# Altium PCB USB-NSTr_v3.PcbDoc
Units mil, origin at the board's own origin, x right, y up, seen from the top; angles counter-clockwise.
Board outline 1496.06 x 2404.88 mil, 2 copper layers (Top Layer, Bottom Layer), stack 65.792 mil thick; 48 components, 60 nets, 213 pads, 50 vias.
Unrouted connection lines stored in the file: 1.
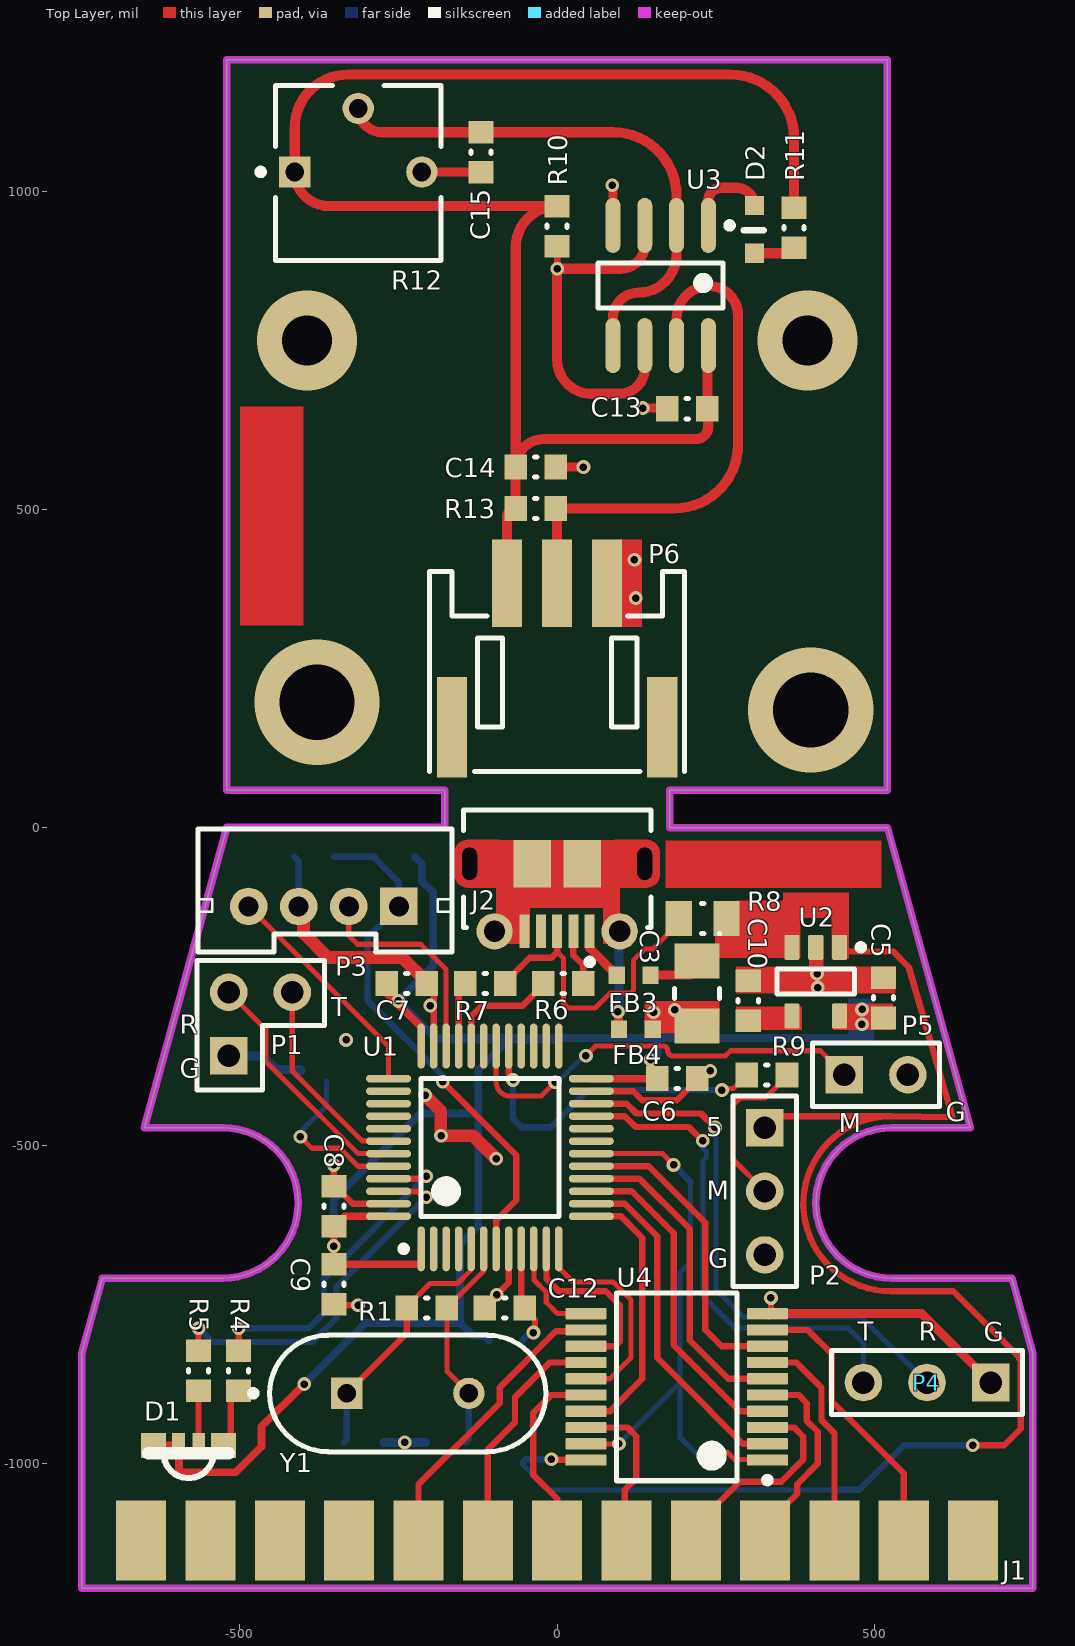
[diagram p0: Top Layer view]
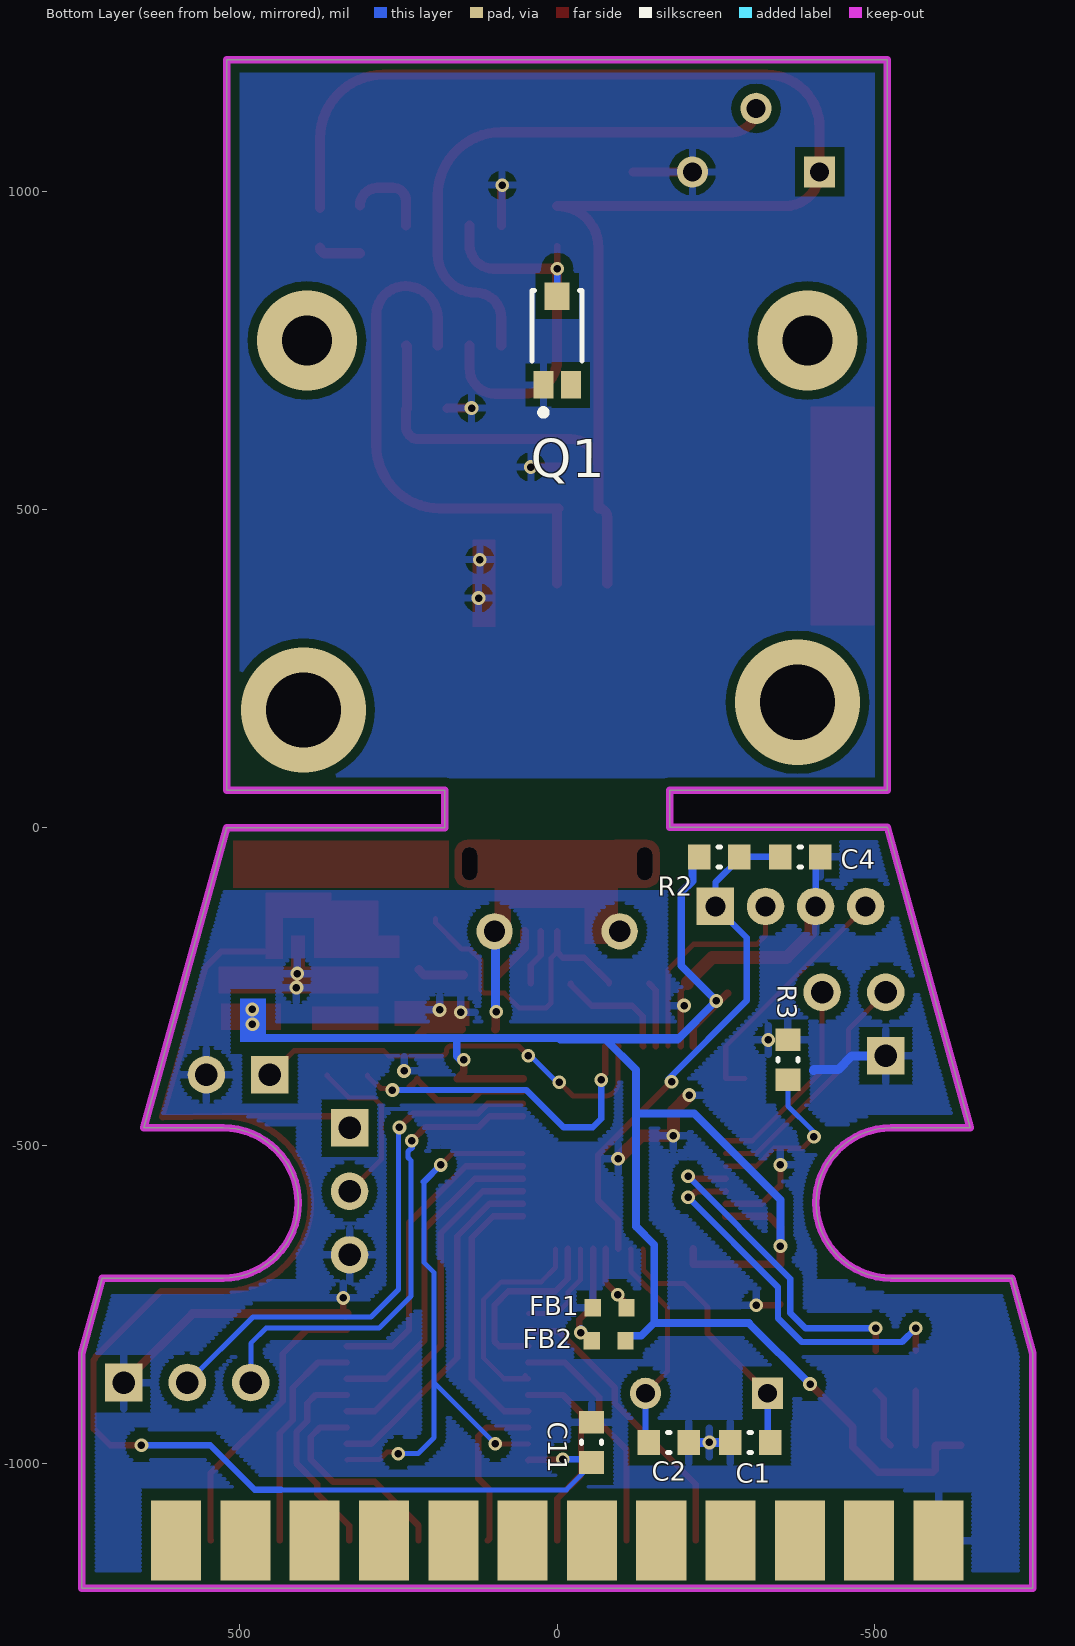
[diagram p1: Bottom Layer view, seen from below]

## Layer stack, top to bottom
Top Solder: solder mask 0.4, Solder Resist, Dk 3.5
Top Layer: signal copper 1.4
Dielectric1: core 62.9921, FR-4, Dk 4.8
Bottom Layer: signal copper 1.4
Bottom Solder: solder mask 0.4, Solder Resist, Dk 3.5

## Board outline
-748.03,-1196.85 -748.03,-826.77 -715.41,-708.66 -525.31,-708.66 ccw(c-525.31,-590.55) -525.31,-472.44 -649.69,-472.44 -519.68,0 -519.68,0.19 -177.17,0.19 -177.17,59.06 -519.68,59.06 -519.68,1208.03 519.69,1208.03 519.69,59.06 177.17,59.06 177.17,0 519.69,0 650.17,-472.44 525.31,-472.44 ccw(c525.31,-590.55) 525.31,-708.66 715.41,-708.66 748.03,-826.77 748.03,-1196.85

## Design rules (kind name [scope] priority, off if disabled: settings)
Clearance Clearance_1 [InPolygon] p1: gap=14 ignorepadtopadclearanceinfootprint=FALSE except(0: Arc-Hole Track-Hole SMDPad-Hole THPad-Hole Via-Hole Fill-Hole Poly-Hole Region-Hole Text-Hole)
Clearance [All] p2: gap=6 ignorepadtopadclearanceinfootprint=FALSE except(0: Arc-Hole Track-Hole SMDPad-Hole THPad-Hole Via-Hole Fill-Hole Poly-Hole Region-Hole Text-Hole)
FabricationTestPointUsage TestPointUsage [All] p1: valid=0 allowmultiple=FALSE
FabricationTestpoint Testpoint [(IsPad And (OnTopLayer Or OnBottomLayer))] p1: side=3 testpointundercomponent=TRUE minsize=40 maxsize=100 preferedsize=60 minholesize=0 maxholesize=40 preferedholesize=32 testpointgrid=1 allowsidetop=TRUE allowsidebottom=TRUE usegrid=TRUE gridtolerance=0.01
HoleSize [All] p1: absolutevalues=TRUE maxlimit=787.4 minlimit=11.81 maxpercent=80.000 minpercent=20.000
HoleToHoleClearance [All] p1: gap=0 allowstackedmicrovias=TRUE
MinimumSolderMaskSliver [All] p1: minsoldermaskwidth=0
PlaneClearance [All] p1: clearance=15.75
PlaneConnect [All] p1: planeconnectstyle=Direct reliefexpansion=11.81 reliefentries=4 reliefconductorwidth=11.81 reliefairgap=11.81
PolygonConnect [All] p1: connectstyle=Relief reliefconductorwidth=11.81 reliefentries=4 polygonreliefangle="90 Angle" airgapwidth=11.81
RoutingVias [All] p1: holewidth=19.68 width=51.18 viastyle="Through Hole" minholewidth=11.81 minwidth=19.68 maxholewidth=393.7 maxwidth=787.4
SilkToSilkClearance [All] p1: silktosilkclearance=0
SilkToSolderMaskClearance SilkscreenOverComponentPads [IsPad] p1: minsilkscreentomaskgap=0 clearancetoexposedcopper=TRUE
SolderMaskExpansion [All] p1: expansion=4
Width [All] p1: maxlimit=200 minlimit=6 preferedwidth=10
21 further rules are at their usual default settings.

## Classes and differential pairs
component class Detector: C13 C14 C15 D2 P6 Q1 R10 R11 R12 R13 U3
component class USB-NSTr_v3: C1 C2 C3 C4 C5 C6 C7 C8 C9 C10 C11 C12 D1 FB1 FB2 FB3 FB4 J1 J2 L1 L2 P1 P2 P3 P4 P5 R1 R2 R3 R4 R5 R6 R7 R8 R9 U1 U2 U4 Y1

## Components (designator, comment, footprint, x,y, rotation, side; value= is the part's Value field where it differs from the comment)
C1 "CAP 22pF" CAPC0603(1608)100_N -304,-967.37 r0 bottom value=22pF
C2 "CAP 22pF" CAPC0603(1608)100_N -175.3,-967.37 r180 bottom value=22pF
C3 "TAJA106K016RNJ" CAPMP3217X18-T_V 220.32,-261.28 r270 top
C4 "CAP 1uF 25V" CAPC0603(1608)100_N -382.33,-46.07 r0 bottom value=1uF
C5 "CAP 2.2uF 16V" CAPC0603(1608)55_N 513.66,-268.1 r270 top value=2.2uF
C6 "CAP 100nF 6.3V" CAPC0603(1608)100_N 188.82,-394.97 r180 top value=100nF
C7 "CAP 100nF 6.3V" CAPC0603(1608)100_N -236.45,-245.4 r180 top value=100nF
C8 "CAP 100nF 6.3V" CAPC0603(1608)100_N -351.35,-595.68 r270 top value=100nF
C9 "CAP 100nF 6.3V" CAPC0603(1608)100_N -351.35,-718.68 r90 top value=100nF
C10 "CAP 10nF 16V" CAPC0603(1608)100_N 300.64,-272.67 r270 top value=10nF
C11 "CAP 100nF 6.3V" CAPC0603(1608)100_N -54.34,-967.37 r270 bottom value=100nF
C12 "CAP 100nF 6.3V" CAPC0603(1608)100_N -82.68,-755.79 r0 top value=100nF
C13 "CAP 100nF 6.3V" CAPC0603(1608)100_N 204.78,658.84 r0 top value=100nF
C14 "CAP 100nF 6.3V" CAPC0603(1608)100_N -33.58,567.15 r180 top value=100nF
C15 "CAP 100nF 6.3V" CAPC0603(1608)100_N -119.57,1062.43 r90 top value=100nF
D1 "Bi-Color LED" LED_Bi_Color_1204 -579.91,-983.94 r270 top
D2 "LED2" 0603 349.23,828.45 r90 top
FB1 "BLM18PG600SN1J" MURA-BLM18PG_KG-CHIP-2_V2 -82.68,-755.79 r0 bottom
FB2 "BLM18PG600SN1J" MURA-BLM18PG_KG-CHIP-2_V2 -80.91,-807.23 r0 bottom
FB3 "BLM18PG600SN1J" MURA-BLM18PG_KG-CHIP-2_V2 120.39,-232.09 r180 top
FB4 "BLM18PG600SN1J" MURA-BLM18PG_KG-CHIP-2_V2 123.98,-317.19 r180 top
J1 "D Connector 25" DB25-EDGE-Female-S 0,-1121.65 r0 top
J2 "105017-0001" USB-MICRO-B_V 0,-110.09 r180 top locked
P1 "Header 4" PH2.0-LI-4P -367.19,-124.03 r180 top
P2 "Header 3" HDR1X3#1 326.56,-472.24 r270 top
P3 "MHDR1X3" HDR1X3#2 -316.78,-259.16 r180 top
P4 "Header 3" HDR1X3#1 681.83,-873.03 r180 top
P5 "Header 2" HDR1X2 451.76,-388.96 r0 top
P6 "Header 3" PH2.0-WS-3P 0,157.98 r0 top
Q1 "TEMT6000X01" VSIL-TEMT6000X01_V 0,766.25 r90 bottom
R1 "1M 1%" RESC0603(1608)_N -204.96,-755.79 r180 top value="1000000.00 Ohm"
R2 "10K 1% 0603(1608)" RESC0603(1608)_N -255.09,-46.49 r0 bottom value="10000.00 Ohm"
R3 "10K 1%" RESC0603(1608)_N -362.96,-365.14 r270 bottom value="10000.00 Ohm"
R4 "1K 1%" RESC0603(1608)_N -501.02,-854.7 r270 top value="1000.00 Ohm"
R5 "1K 1%" RESC0603(1608)_N -563.9,-854.7 r270 top value="1000.00 Ohm"
R6 "27R 1%" RESC0603(1608)_N 9.84,-245.4 r0 top value="27.00 Ohm"
R7 "27R 1%" RESC0603(1608)_N -113.13,-245.4 r0 top value="27.00 Ohm"
R8 "1K5 1%" RESC0805(2012)_N 228.9,-142.96 r0 top value="1500.00 Ohm"
R9 "100R 1%" RESC0603(1608)_N 330.1,-388.96 r0 top value="100.00 Ohm"
R10 "10K 1% 0603(1608)" RESC0603(1608)_N 0,946.26 r90 top value="10000.00 Ohm"
R11 "1K 1% 0603(1608)" RESC0603(1608)_N 372.82,943.54 r90 top value="1000.00 Ohm"
R12 "RPot" BOUR-3362P -312.89,1029.97 r0 top
R13 "3K3 1% 0603(1608)" RESC0603(1608)_N -33.81,502.16 r180 top value="3300.00 Ohm"
U1 "STM32F103C8T6" STM-LQFP48_N -105.74,-503.24 r90 top
U2 "LP2985A-33DBVT" DBV0005A_N 406.83,-242.52 r270 top
U3 "LM393M" M08A_N 162.83,852.73 r270 top
U4 "SN74HCT244DBR" DB0020A_N 188.07,-879.93 r180 top
Y1 "ADA2214" ADAI-THHF-49S3 -235,-890 r0 top

## Footprints (in the part's own frame and the unit in brackets; to place one, negate y for a bottom-side part, rotate by r counter-clockwise, add the part's x,y. Pads: shape width x height; smd on the part's side, far side on the other; paste and mask are expansions set on the pad)
0603 [mil]
  rect 30x30 smd: 1(75,39) 2(150,39)
  silkscreen extent 111,24 111,56
ADAI-THHF-49S3 [mm] "THD, 2-Leads, Body 11.05x4.65mm, Pitch 4.88mm"
  rect 1.25x1.25 hole 0.75: 1(-2.44,0)
  round 1.25 hole 0.75: 2(2.44,0)
  silkscreen extent -6.3,-2.34 5.52,2.33, body extent -5.53,-2.34 5.53,2.33, height 3.5
BOUR-3362P [mm] "THD, 3-Leads, Body 6.6x6.99mm, Pitch 2.54mm"
  rect 1.25x1.25 hole 0.75: 1(-2.54,0.035)
  round 1.25 hole 0.75: 2(0,2.575) 3(2.54,0.035)
  silkscreen extent -4.02,-3.49 3.3,3.5, body extent -3.3,-3.49 3.3,3.49, height 4.95
CAPC0603(1608)55_N [mm] "Chip Capacitor, Body 1.6x0.8mm, Height 0.55mm, IPC Medium Density"
  rect 0.9x1 smd: 1(-0.8,0) 2(0.8,0)
  silkscreen extent -0.05,-0.4 0.05,0.4, body extent -0.87,-0.48 0.88,0.47, height 0.55
CAPC0603(1608)100_N [mm] "Chip Capacitor, Body 1.6x0.8mm, Height 1.0mm, IPC Medium Density"
  rect 0.9x1 smd: 1(-0.8,0) 2(0.8,0)
  silkscreen extent -0.05,-0.4 0.05,0.4, body extent -0.87,-0.48 0.88,0.47, height 1
CAPMP3217X18-T_V [mm] "Molded Capacitor, 2-Leads, Body 3.40x1.8mm"
  rect 1.4x1.8 smd: 1(-1.3,0) 2(1.3,0)
  silkscreen extent -2.45,-0.9 0.2,0.95, body extent -1.92,-0.9 1.92,0.9, height 1.8
DB0020A_N [mm] "SOP, 20-Leads, Body 5.6x7.5mm, Pitch 0.65mm, IPC Medium Density"
  rrect22% 1.65x0.45 smd: 1(-3.625,2.925) 2(-3.625,2.275) 3(-3.625,1.625) 4(-3.625,0.975) 5(-3.625,0.325) 6(-3.625,-0.325) 7(-3.625,-0.975) 8(-3.625,-1.625) 9(-3.625,-2.275) 10(-3.625,-2.925) 11(3.625,-2.925) 12(3.625,-2.275) 13(3.625,-1.625) 14(3.625,-0.975) 15(3.625,-0.325) 16(3.625,0.325) 17(3.625,0.975) 18(3.625,1.625) 19(3.625,2.275) 20(3.625,2.925)
  silkscreen extent -3.75,-3.75 2.4,3.85, body extent -3.91,-3.6 3.91,3.6, height 1.91
DB25-EDGE-Female-S [mm] "D-SUB- 25P, MALE, SOLDER BUCKET"
  rect 2x3.2 smd: 1(16.62,0) 2(13.85,0) 3(11.08,0) 4(8.31,0) 5(5.54,0) 6(2.77,0) 7(0,0) 8(-2.77,0) 9(-5.54,0) 10(-8.31,0) 11(-11.08,0) 12(-13.85,0) 13(-16.62,0)
  rect 2x3.2 smd far side: 14(15.23,0) 15(12.46,0) 16(9.69,0) 17(6.92,0) 18(4.15,0) 19(1.38,0) 20(-1.39,0) 21(-4.16,0) 22(-6.93,0) 23(-9.7,0) 24(-12.47,0) 25(-15.24,0)
DBV0005A_N [mm] "SOT23, 5-Leads, Body 3.05x1.75mm, Pitch 0.95mm, IPC Medium Density"
  rrect17% 1x0.6 smd: 1(-1.375,0.95) 2(-1.375,0) 3(-1.375,-0.95) 4(1.375,-0.95) 5(1.375,0.95)
  silkscreen extent -1.5,-1.55 0.5,1.93, body extent -1.42,-1.46 1.42,1.46, height 1.08
HDR1X2 [mm] "Connector; Header; 2 Position"
  rect 1.5x1.5 hole 0.9: 1(0,0)
  round 1.5 hole 0.9: 2(2.54,0)
  silkscreen extent -1.27,-1.27 3.81,1.27
HDR1X3#1 [mm] "Connector; Header; 3 Position"
  rect 1.5x1.5 hole 0.9: 1(0,0)
  round 1.5 hole 0.9: 2(2.54,0) 3(5.08,0)
  silkscreen extent -1.27,-1.27 6.35,1.27
HDR1X3#2 [mm] "Connector; Header; 3 Position"
  rect 1.5x1.5 hole 0.9: 1(5.08,2.54)
  round 1.5 hole 0.9: 2(2.54,0) 3(5.08,0)
  silkscreen extent 1.24,-1.27 6.35,3.91
LED_Bi_Color_1204 [mm]
  rect 1x0.5 smd: 1(-0.3,0.4) 2(-0.3,-0.4)
  rect 1x1 smd: 3(-0.3,1.4) 4(-0.3,-1.4)
  silkscreen extent 0,-1.6 1,1.6, body extent -0.25,-1.6 1,1.6, height 1
M08A_N [mm] "SOIC, 8-Leads, Body 4.9x3.9mm, Pitch 1.27mm, IPC Medium Density"
  oval 2.2x0.6 smd: 1(-2.4,1.905) 2(-2.4,0.635) 3(-2.4,-0.635) 4(-2.4,-1.905) 5(2.4,-1.905) 6(2.4,-0.635) 7(2.4,0.635) 8(2.4,1.905)
  silkscreen extent -2.52,-2.5 0.9,2.88, body extent -2,-2.5 2,2.5, height 1.75
MURA-BLM18PG_KG-CHIP-2_V2 [mm] "Chip Ferrite Bead, 2-Leads, Body 1.6x0.8mm, Height 0.95mm, Reflow, 0.5 to 1.5A Rated Current"
  rect 0.65x0.7 smd: 1(-0.675,0) 2(0.675,0)
  body extent -0.8,-0.4 0.8,0.4, height 0.95
PH2.0-LI-4P [mm] "长：9.9mm，宽：4.7mm，高：6mm"
  rect 1.5x1.5 hole 0.8: 1(-3,0)
  round 1.5 hole 0.8: 2(-1,0) 3(1,0) 4(3,0)
  silkscreen extent -5.13,-3.08 5.03,1.82, body extent -4.95,-3 4.95,1.7, height 6.01
PH2.0-WS-3P [mm] "长：10mm，宽：7.6mm，高：5.5mm"
  rect 1.2x4 smd: 0(-4.2,-0.006) 0(4.2,-0.006)
  rect 1.2x3.5 smd: 1(-2,5.744) 2(0,5.744) 3(2,5.744)
  silkscreen extent -5.1,-1.78 5.1,6.22, body extent -5,-1.65 5,6.95, height 5.55
RESC0603(1608)_N [mm] "Chip Resistor, Body 1.6x0.8mm, IPC Medium Density"
  rect 0.9x1 smd: 1(-0.8,0) 2(0.8,0)
  silkscreen extent -0.05,-0.4 0.05,0.4, body extent -0.85,-0.47 0.85,0.47, height 0.6
RESC0805(2012)_N [mm] "Chip Resistor, Body 2.0x1.3mm, IPC Medium Density"
  rect 1.05x1.4 smd: 1(-0.95,0) 2(0.95,0)
  silkscreen extent -0.05,-0.6 0.05,0.6, body extent -1.1,-0.67 1.1,0.68, height 0.7
STM-LQFP48_N [mm] "QFP, 48-Leads, Body 7x7mm, Pitch 0.5mm, IPC Medium Density"
  oval 1.8x0.3 smd: 1(-4.05,2.75) 2(-4.05,2.25) 3(-4.05,1.75) 4(-4.05,1.25) 5(-4.05,0.75) 6(-4.05,0.25) 7(-4.05,-0.25) 8(-4.05,-0.75) 9(-4.05,-1.25) 10(-4.05,-1.75) 11(-4.05,-2.25) 12(-4.05,-2.75) 25(4.05,-2.75) 26(4.05,-2.25) 27(4.05,-1.75) 28(4.05,-1.25) 29(4.05,-0.75) 30(4.05,-0.25) 31(4.05,0.25) 32(4.05,0.75) 33(4.05,1.25) 34(4.05,1.75) 35(4.05,2.25) 36(4.05,2.75)
  oval 0.3x1.8 smd: 13(-2.75,-4.05) 14(-2.25,-4.05) 15(-1.75,-4.05) 16(-1.25,-4.05) 17(-0.75,-4.05) 18(-0.25,-4.05) 19(0.25,-4.05) 20(0.75,-4.05) 21(1.25,-4.05) 22(1.75,-4.05) 23(2.25,-4.05) 24(2.75,-4.05) 37(2.75,4.05) 38(2.25,4.05) 39(1.75,4.05) 40(1.25,4.05) 41(0.75,4.05) 42(0.25,4.05) 43(-0.25,4.05) 44(-0.75,4.05) 45(-1.25,4.05) 46(-1.75,4.05) 47(-2.25,4.05) 48(-2.75,4.05)
  silkscreen extent -4.17,-2.75 2.75,3.57, body extent -3.5,-3.5 3.5,3.5, height 1.6
USB-MICRO-B_V [mm] "USB, MICRO B, Body 7.491x4.695 mm, Pitch 0.65 mm"
  rect 0.4x1.35 smd: 1(-1.3,1.35) 2(-0.65,1.35) 3(0,1.35) 4(0.65,1.35) 5(1.3,1.35)
  round 1.45 hole 0.85: 6(-2.5,1.35) 7(2.5,1.35)
  rrect50% 0x0 hole 0.6 slot 1.3 at 90 deg: 8(-3.5,-1.35) 11(3.5,-1.35)
  rect 1.5x1.9 smd: 9(-1,-1.35) 10(1,-1.35)
  Top Layer circle w0.5: c-3.6,-1.8 r0.25
  Top Layer circle w0.5: c3.6,-1.8 r0.25
  Top Layer region: -3.6,-1.8 -3.6,-0.9 -4.1,-0.9 -4.1,-1.8
  Top Layer region: 3.6,-0.9 3.6,-1.8 4.1,-1.8 4.1,-0.9
  Top Layer region: 2.3,-0.4 2.3,-2.3 3.6,-2.3 3.6,-0.4
  Top Layer region: -2.3,-2.3 -2.3,-0.4 -3.6,-0.4 -3.6,-2.3
  Top Layer lines w0.5: 3.6,-1.15 cw(c3.6,-0.9) 3.35,-0.9 cw(c3.6,-0.9) 3.6,-1.15 ; -3.546,-1.144 cw(c-3.6,-0.9) -3.85,-0.9 cw(c-3.6,-0.9) -3.546,-1.144
  silkscreen extent -3.75,-3.5 3.75,2.7, body extent -4.1,-3.9 4.1,1.5, height 2.67
VSIL-TEMT6000X01_V [mm] "SMD, 3-Leads, Body 4x2mm"
  rect 1.1x0.8 smd: 1(-1.775,0.55) 2(-1.775,-0.55)
  rect 1.1x1 smd: 3(1.775,0)
  silkscreen extent -3,-1 2,1, body extent -2,-1 2,1, height 1.05

## Part data
C1 C2: library part CMP-1035-00809-1, "CAP 22pF 16V ±10% 0603 (1608 Metric) Thickness 1mm SMD", Case-EIA=0603, Case-Metric=1608, Rated Voltage="16 V", Tolerance=?±10%, Max Thickness="1 mm", Technology=SMT
C3: library part CMP-1661-00004-1, "Standard Tantalum, 10 uF, +/- 10%, 16 V, -55 to 125 degC, 2-Pin SMD (1206), RoHS, Tape and Reel", Case\Package=SOT-26, Frequency="300 MHz", Max Operating Temperature="150 degC", Max Power Dissipation="300 mW", Min Operating Temperature="-55 degC", Package Quantity=3000, ComponentLink1Description="Manufacturer URL", ComponentLink1URL=http://www.avx.com/, ComponentLink2Description=Datasheet, ComponentLink2URL=http://datasheets.avx.com/TAJ.pdf, ComponentLink3Description="Package Specification", ComponentLink3URL=http://www.avx.com/download/software/literature/AVX-Footprint-Library.pdf, DatasheetVersion=Feb-16, Elements=2, Height="1.3 mm", hFE Min=60, Length="3.1 mm", Mount="Surface Mount", PackageDescription="2-Pin Surface Mount Device, Body 3.2 x 1.65 mm", PackageReference=CAPMP3217X18-T, Packaging="Tape and Reel", Pins=6, Radiation Hardening=No, REACH SVHC="No SVHC", RoHSCompliant=true, Vce Max="500 mV", Width="1.7 mm"
C4: library part CMP-1035-02741-1, "CAP 1uF 25V ±20% 0603 (1608 Metric) Thickness 1mm SMD", Case-EIA=0603, Case-Metric=1608, Rated Voltage="25 V", Tolerance=?±20%, Max Thickness="1 mm", Technology=SMT
C5: library part CMP-1035-02764-1, "CAP 2.2uF 16V ±20% 0603 (1608 Metric) Thickness 0.55mm SMD", Case-EIA=0603, Case-Metric=1608, Rated Voltage="16 V", Tolerance=?±20%, Max Thickness="0.55 mm", Technology=SMT
C6 C7 C8 C9 C11 C12 C13 C14 C15: library part CMP-1035-02576-1, "CAP 100nF 6.3V ±10% 0603 (1608 Metric) Thickness 1mm SMD", Case-EIA=0603, Case-Metric=1608, Rated Voltage="6.3 V", Tolerance=?±10%, Max Thickness="1 mm", Technology=SMT
C10: library part CMP-1035-02310-1, "CAP 10nF 16V ±5% 0603 (1608 Metric) Thickness 1mm SMD", Case-EIA=0603, Case-Metric=1608, Rated Voltage="16 V", Tolerance=?±5%, Max Thickness="1 mm", Technology=SMT
D1: library part LED-RG-KAAK-4, "LED Indicator, Red / Green, 2 V, -40 to 100 degC, 4-Pin SMD, RoHS, Tape and Reel", Emitting Color=YellowGreen/Red, Forward Current=30mA, Forward Voltage=2.6V, Manufacturer=Dialight, Operating Temperature Classification=Industrial, Operating Temp Range=-55Cto100C, Package Description="4-Pin Surface Mount Device, Body 4.32 x 8.77 mm, Pitch 1.5 mm", Package Reference=591-3001-013F, Package Type=SMD, Power Dissipation=100W, Reverse Voltage=5V, Test Current (It)=20mA, Datasheet URL=https://datasheet.ciiva.com/2132/c17245-2132277.pdf, Datasheet Version="Rev. B, 10/2010", DELETED=Compliant, Dominant Wave Length=570/628nm, High Brightness=No, Lens Dimensions=2.8x2.8x2.7mm, Lens Type=NonDiffused, Luminous Intensity=8/6.5mcd, Lum Intensity=8/6.5mcd, Main Category=ChipLED, Manufacturer URL=http://www.dialight.com/, Mounting=SurfaceMount, Mounting Technology=SurfaceMount, Number of  Elements=2, Packaging=TapeandReel, Pin Count=2, Product Depth (mm)=8.8mm, Product Height (mm)=5mm, Product Length (mm)=4.3mm, Rad Hardened=No, Shape Type=Circular, Type=Bi-Color, Viewing Angle=40deg
D2: "Typical RED, GREEN, YELLOW, AMBER GaAs LED", LatestRevisionDate=17-Jul-2002, LatestRevisionNote="Re-released for DXP Platform.", PackageDescription="SM LED; 2 Flat Leads", PackageReference=3.2X1.6X1.1, PackageVersion=Feb-2002, Published=8-Jun-2000, Publisher="Altium Limited"
FB1 FB2 FB3 FB4: library part CMP-0686-00574-2, "Chip Ferrite Bead for Power Lines, 60 Ohm, 500 mA, -55 to 125 degC, 1.6 x 0.8 x 0.95 mm SMD, Tape and Reel", DC Resistance="0.10 Ohm Max.", Manufacturer=Murata, Operating Temperature Range="-55 to 125 degC", Rated Current="500 mA", ComponentLink1Description="Manufacturer URL", ComponentLink1URL=http://www.murata.com/, ComponentLink2Description=Datasheet, ComponentLink2URL=http://www.murata.com/products/catalog/pdf/c31e.pdf, ComponentLink3Description="Package Specification", ComponentLink3URL=http://www.murata.com/products/catalog/pdf/c31e.pdf, DatasheetVersion=08/2013, Impedance (at 100 MHz)="60 Ohm Typ.", Mounting Technology="Surface Mount", PackageDescription="2-Pin Chip, Body 1.6 x 0.8 mm", PackageReference=BLM18_H950-2, Packing="Tape and Reel", PartNumber=BLM18PG600SN1J
J1: "Receptacle Assembly, 25 Position, Right Angle", PackageDocument=U, DatasheetDocument=19-Mar-1999, Gender=Receptacle, LatestRevisionDate=17-Jul-2002, LatestRevisionNote="Re-released for DXP Platform.", Orientation="Right Angle", PackageReference=787202, Positions=25, Published=15-Jun-2001, Publisher="Altium Limited"
J2: library part CMP-2000-05827-1, "Micro-USB B Receptacle, Right Angle, Bottom Mount, Surface Mount, with Solder Tabs, -30 to 85 degC, 5-Pin USB, RoHS, Tape and Reel", Manufacturer=Molex, Package Description="5-Leads USB, Micro B, Body 7.5 x 5 mm, Pitch 0.65 mm", Package Reference=MICRO-B, Package Version="Rev. F, 12/2012", Standard Package=1, Voltage - Max=30V, 3D Model=105017-0001.stp, Catalog Drawings=1050170001, Category=Connectors,Interconnects, Circuits=5, Connector Type=USB-microB, Datasheet URL=http://www.molex.com/elqNow/elqRedir.htm?ref=http://www.molex.com/webdocs/datasheets/pdf/en-us/1050170001_IO_CONNECTORS.pdf, Datasheet Version=03/2016, Family=USB,DVI,HDMIConnectors, Featured Product=Micro-USBConnectorsUSBConnectors, Features=Shielded,SolderRetention, Gender=Receptacle, Ingress Protection=-, Manufacturer URL=http://www.molex.com/, Mating Products=WM17145-ND-CABLEMICROUSBBTOSTDA1.0MWM17147-ND-CABLEMICROUSBBTOSTDA2.0MWM17146-ND-CABLEMICROUSBBTOSTDA1.5M, Mounting Technology=SurfaceMount, Mounting Type=BoardCutout,SurfaceMount,RightAngle, Number of Contacts=5, Online Catalog=Molex-MicroUSB, Other Names=WM1399DKR, Package URL=http://www.molex.com/pdm_docs/sd/1050170001_sd.pdf, Packaging=Digi-Reel?, PCN Assembly/Origin=ResinSupplier21/Oct/2015, RoHS Information=1050170001CertofCompliance, Series=-, Specifications=-
P1: "Header, 4-Pin", LatestRevisionDate=17-Jul-2002, LatestRevisionNote="Re-released for DXP Platform.", Publisher="Altium Limited"
P2 P3 P4 P6: "Header, 3-Pin", LatestRevisionDate=17-Jul-2002, LatestRevisionNote="Re-released for DXP Platform.", Publisher="Altium Limited"
P5: "Header, 2-Pin", LatestRevisionDate=17-Jul-2002, LatestRevisionNote="Re-released for DXP Platform.", Publisher="Altium Limited"
Q1: library part CMP-1666-00035-1, "Ambient Light Sensor / , 100 mW, -40 to 100 degC, 3-Pin SMD, RoHS, Tape and Reel", Case\Package=0603, Case Code (Metric)=1608, Colour=Red, Forward Current="20 mA", Forward Voltage="2 V", Max Operating Temperature="85 degC", Min Operating Temperature="-55 degC", Package Quantity=3000, Power Rating="75 mW", Case Code (Imperial)=0603, ComponentLink1Description="Manufacturer URL", ComponentLink1URL=http://www.vishay.com/, ComponentLink2Description=Datasheet, ComponentLink2URL=http://www.vishay.com/docs/81579/temt6000.pdf, DatasheetVersion="Rev. 1.9, 08/2011", Height="0.8 mm", Illumination Colour=Red, Length="1.6 mm", Lens Style=Diffused, Luminous Intensity="54 mcd", Mount="Surface Mount", Nominal Vf="2 V", PackageDescription="3-Pin Surface Mount Device, Body 4 x 2 mm", PackageReference=1206, Packaging="Tape and Reel", Pins=2, Radiation Hardening=No, RoHSCompliant=true, Viewing Angle="130 degrees", Width="0.8 mm"
R1: library part CMP-1012-00849-1, "1M 0.1W 1% 0603 (1608 Metric)  SMD", Case-EIA=0603, Case-Metric=1608, Power="0.1 W", Tolerance="1 %", Technology=SMT
R2 R3 R10: library part CMP-1012-00623-1, "10K 0.1W 1% 0603 (1608 Metric)  SMD", Case-EIA=0603, Case-Metric=1608, Power="0.1 W", Tolerance="1 %", Technology=SMT
R4 R5 R11: library part CMP-1012-00510-1, "1K 0.1W 1% 0603 (1608 Metric)  SMD", Case-EIA=0603, Case-Metric=1608, Power="0.1 W", Tolerance="1 %", Technology=SMT
R6 R7: library part CMP-1012-00331-1, "27R 0.1W 1% 0603 (1608 Metric)  SMD", Case-EIA=0603, Case-Metric=1608, Power="0.1 W", Tolerance="1 %", Technology=SMT
R8: library part CMP-1013-00528-1, "1K5 0.125W 1% 0805 (2012 Metric)  SMD", Case-EIA=0805, Case-Metric=2012, Power="0.125 W", Tolerance="1 %", Technology=SMT
R9: library part CMP-1012-00397-1, "100R 0.1W 1% 0603 (1608 Metric)  SMD", Case-EIA=0603, Case-Metric=1608, Power="0.1 W", Tolerance="1 %", Technology=SMT
R12: "Potentiometer", LatestRevisionDate=17-Jul-2002, LatestRevisionNote="Re-released for DXP Platform.", PackageDescription="Variable Resistor, Thru-Hole; 3 Leads", PackageReference=VR5, Published=8-Jun-2000, Publisher="Altium Limited", Set Position=0.5, Sim Note="Enter the Resistance value and the set point into parameter fields."
R13: library part CMP-1012-00567-1, "3K3 0.1W 1% 0603 (1608 Metric)  SMD", Case-EIA=0603, Case-Metric=1608, Power="0.1 W", Tolerance="1 %", Technology=SMT
U1: library part CMP-0237-00215-3, "ARM Cortex-M3 32-bit MCU, 64 KB Flash, 20 KB Internal RAM, 37 I/Os, 48-pin LQFP, -40 to 85 degC, Tray", I/Os (High Current)=37, Operating Frequency(F) (Processor speed) (MHz)=72, Supply Voltage(Vcc) min (V)=2, A/D Converter="2x12-bit (10 Channel)", ComponentLink1Description="Manufacturer URL", ComponentLink1URL=http://www.st.com/web/en/home.html, ComponentLink2Description=Datasheet, ComponentLink2URL=http://www.st.com/st-web-ui/static/active/en/resource/technical/document/datasheet/CD00161566.pdf, ComponentLink3Description="Package Specification", ComponentLink3URL=http://www.st.com/st-web-ui/static/active/en/resource/technical/document/datasheet/DM00058181.pdf, Core="ARM Cortex-M3", DatasheetVersion="Rev. 16", FLASH Size (Prog) (kB)=64, Internal RAM Size (kB)=20, Mounting Technology="Surface Mount", PackageDescription="48-Pin Low Profile Quad Flat Package, 7 x 7 mm Body, 0.5 mm Pitch", PackageReference=LQFP48, PackageVersion="Rev. 6, 06/2013", Packing=Tray, PartId=1, PartNumber=STM32F103C8T6
U2: library part CMP-0758-00051-2, "Single Output Low Noise LDO, 150 mA, Fixed 3.3 V Output, 1% Tolerance, 2.2 to 16 V Input, Low IQ, 5-Pin SOT-23 (DBV), -40 to 125 degC, Green (RoHS & no Sb/Br), Tape and Reel", Manufacturer="Texas Instruments", Operating Temperature Range (degC)="-40 to 125", Accuracy (%)=1, ComponentLink1Description="Manufacturer URL", ComponentLink1URL=http://www.ti.com/, ComponentLink2Description=Datasheet, ComponentLink2URL=http://www.ti.com/lit/ds/symlink/lp2985-50.pdf, ComponentLink3Description="Package Specification", ComponentLink3URL=http://www.ti.com/litv/pdf/mpds018j, DatasheetVersion=SLVS522N, Fixed Output Options (V)=3.3, Iout (Max) (A)=0.15, Iq (Typ) (mA)=0.85, Mounting Technology="Surface Mount", Output Options="Fixed Output", PackageDescription="5-Pin Plastic Small Outline, Body 2.9 x 1.6 mm, Pitch 0.95 mm", PackageReference=DBV0005A, PackageVersion=4073253-4/L, Packing="Tape and Reel", PartNumber=LP2985A-33DBVT, RoHS=TRUE, Vdo (Typ) (mV)=280, Vin (V)="2.2 to 16"
U3: library part CMP-0055-00682-2, "Low Power Low Offset Voltage Dual Comparator, 8-pin Narrow SOIC", Manufacturer="National Semiconductor", PackageTopMarking=NSZXTT*LM*393M, PowerWise=N, Code_IPC=SOIC127P600-8, Code_JEDEC=MS-012-AA, ComponentLink1Description="LM393 Datasheet", ComponentLink1URL=http://www.national.com/ds/LM/LM393.pdf, ComponentLink2Description="LM393 Web Page", ComponentLink2URL=http://www.national.com/pf/LM/LM393.html, ComponentLink3Description="M08A Package Page", ComponentLink3URL=http://www.national.com/packaging/folders/m08a.html, CompType=Amplifiers, DatasheetVersion=Aug-2002, PackageDescription="SOIC Narrow, 4.9 x 3.9 x 1.45mm, 8 Lead, 1.27mm Pitch", PackageReference=M08A, PackageVersion="revM, May-2009", PartId=1, PinCount=8, RevisionNote="Component URLs added", RoHS=N
U4: library part CMP-0440-00427-3, "Octal Buffers And Line Drivers With 3-State Outputs, DB0020A, LARGE T&R", F @ Nom Voltage(Max)(Mhz)=25, Generic Part Number=SN74HCT244, ICC @ Nom Voltage(Max)(mA)=0.08, Manufacturer="Texas Instruments", Operating Temperature Range(C)="-40 to 85", Rating=Catalog, tpd @ Nom Voltage(Max)(ns)=32, Voltage(Nom)(V)=5, Bits(#)=8, Code_JEDEC=MO-150, DatasheetVersion=SCLS175D, Input Type=TTL, Output Type=CMOS, PackageReference=DB0020A, PackageVersion=http://www.ti.com/lit/ml/mpds508/mpds508.pdf, PartId=1, VCC(Max)(V)=5.5, VCC(Min)(V)=4.5
Y1: library part CMP-1740-00004-1, "Crystal, 12 MHz, 18 pF, 30 PPM, -20 to 70 degC, 2-Pin THD, RoHS", Case\Package=PDIP, Max Dual Supply Voltage="15 V", Max Operating Temperature="70 degC", Max Supply Voltage="30 V", Min Dual Supply Voltage="1.75 V", Min Operating Temperature="0 degC", Min Supply Voltage="3.5 V", Nominal Dual Supply Voltage="12 V", Nominal Supply Current="7.5 mA", Nominal Voltage Gain="106.02 dB", Package Quantity=50, Channels=1, ComponentLink1Description="Manufacturer URL", ComponentLink1URL=https://www.adafruit.com/, ComponentLink2Description=Datasheet, ComponentLink2URL=https://cdn-shop.adafruit.com/product-files/2214/2214datasheet.pdf, DatasheetVersion=Nov-14, Elements=1, Height="4.57 mm", Length="9.81 mm", Mount="Through Hole", Nominal Supply Voltage="12 V", PackageDescription="2-Pin Through Hole Device, Body 11.05 x 4.65 mm, Pitch 4.88 mm", PackageReference=THHF-49S3, Packaging=Rail/Tube, Pins=8, Propagation Delay="115 ns", Radiation Hardening=No, REACH SVHC="No SVHC", RoHSCompliant=true, Weight="0.015535 oz", Width="6.35 mm"

## Via types
v1: diameter 21.65, hole 11.81, Top Layer to Bottom Layer, 46 vias
v2: diameter 196.85, hole 118.11, Top Layer to Bottom Layer, 2 vias
v3: diameter 157.48, hole 78.74, Top Layer to Bottom Layer, 2 vias

## Nets (pads, with @x,y where several pads share a name; then routed paths per layer and width w, separated by ;. In a path a pad name is that pad's centre, name@x,y a point inside that pad or via, vN(x,y) a via of type N, cw(c..) or ccw(c..) an arc to the next point about the centre after c; other vN are vias at no path point)
3.3VD: C5.2 C6.2 C7.2 C8.2 C9.2 D1.2 D1.4 FB2.1 R2.2 U1.1 U1.24 U1.36 U1.48 U2.5 | length 2659.2
  Top Layer w12: D1.4@-635.03,-971.62 -596.17,-971.62 D1.2@-599.5,-974.94 ; D1.2 -594.88,-972.91 -594.88,-1009.81 -590.69,-1014 -505.38,-1014 -465.19,-973.8 -465.19,-942.9 v1(-397.83,-875.53) ; C7.2@-267.95,-260.51 -214,-314.45 U1.36 ; U1.48 -333.71,-611.51 -351.35,-629.15 C9.2 -350.86,-686.7 -214.1,-686.7 -214,-686.61 U1.1 ; U1.24 C6.2 146.97,-384.62 v1(146.97,-365.45)
  Bottom Layer w12: v1(-397.83,-875.53) -301.75,-779.45 -152.88,-779.45 -152.88,-778.79 ; v1(-351.35,-658.31) -351.35,-585.56 -215.63,-449.84 -124.04,-449.84 ; R2.2 -212.9,-57.18 -212.9,-84.18 -195.06,-102.02 -195.06,-217.61 v1(-250.13,-272.68) -189.35,-333.46 -76.46,-333.46 ; FB2.1 -107.49,-806.25 -114.28,-799.45 -132.23,-799.45 -152.88,-778.79 ; -4.94,-333.46 -76.46,-333.46 ; v1(146.97,-365.45) 152.32,-365.45 157.95,-359.82 157.95,-333.46 ; -152.88,-778.79 -152.88,-656.35 -124.04,-627.51 -124.04,-449.84 ; -124.04,-449.84 -124.04,-381.04 -76.46,-333.46
  other v1: 479.43,-309.26 479.73,-286.09
+5: C13.2 C14.2 P6.1 R10.2 R11.2 R12.1 R13.2 U3.8 | length 2619.9
  Top Layer w16: P6.1 -78.74,488.72 cw(c-65.3,488.72) R13.2 -65.3,567.15 C14.2 ; U3.8 ccw(c237.83,756.68) 236.28,756.68 C13.2 cw(c236.28,657.32) 237.79,657.32 237.79,630.85 cw(c218.12,630.85) 218.12,611.18 -21.04,611.18 ccw(c-21.04,567.15) C14.2 ; R11.2 372.82,1084.44 ccw(c272.82,1084.44) 272.82,1184.44 -329.27,1184.44 ccw(c-329.27,1100.82) -412.89,1100.82 R12.1 ccw(c-359.3,1031.35) -359.3,977.76 R10.2 ccw(c0,912.68) -65.07,912.68 C14.2
D+: J2.3 R7.2 R8.1 | length 495.2
  Top Layer w8: 0,-195.72 9.84,-205.57 9.84,-276.17 17.55,-283.88 59.81,-283.88 83.18,-260.51 115.24,-260.51 119.92,-255.82 119.92,-208.83 137.8,-190.96 150.39,-190.96 191.5,-149.85 R8.1
  Top Layer w10: R7.2 -81.64,-243.43 -42.91,-204.7 -8.98,-204.7 0,-195.72 J2.3
D-: J2.2 R6.2 | length 88.7
  Top Layer w10: J2.2 25.59,-201 41.34,-216.75 R6.2
GND: C1.2 C2.2 C3.2 C4.1 C5.1 C6.1 C7.1 C8.1 C9.1 C10.1 C11.1 C13.1 C14.1 C15.1 FB1.2 FB4.1 J1.25 P1.3 P2.3 P3.1 P4.1 P5.2 P6.3 Q1.1 R3.1 R12.3 U1.23 U1.35 U1.47 U2.2 U3.4 U4.10 | length 1955.3
  Top Layer w10: C9.1 -350.07,-751.46 v1(-313.1,-751.46) ; v1(-351.35,-530.73) C8.1 -349.38,-564.19 -321.75,-591.82 U1.47 ; C7.1 -194.32,-256.04 U1.35 ; U1.23 119.92,-414.66 134.15,-428.89 188.37,-428.89 C6.1@220.32,-396.94 ; FB4.1 151.06,-316.68 151.06,-291.02 v1(151.57,-290.5) ; C6.1 C6.1@220.32,-396.94 ; C6.1@233.03,-409.66 C6.1@220.32,-396.94 ; U4.10@336.31,-760.92 v1(336.31,-739.91)
  Top Layer w14: R12.3 -119.57,1031.35 C15.1 ; C14.1 v1(41.34,567.15) ; v1(86.54,1010.62) cw(c86.54,1009.33) 87.83,1009.33 U3.4 ; v1(134.55,659.84) 172.28,659.84 cw(c172.28,658.84) C13.1 ; FB4.1 208.62,-317.19 C3.2@217.31,-325.89 ; U4.10@332.64,-766.63 U4.10 573.58,-764.77 P4.1
  Top Layer w20: P1.3 -399.09,-131.5 -399.09,-166.06 -360.78,-204.36 -244.03,-204.36 -204.96,-243.43 C7.1 ; v1(-207.8,-420.76) -207.8,-421.21 -182.94,-446.06 -182.94,-484.64 v1(-182.63,-484.96) -131.89,-484.96 v1(-95.89,-520.96)
  Bottom Layer w10: C4.1 -406.56,-53.34 P1.3
  Bottom Layer w14: P3.1 -463.78,-359.16 -442.04,-380.89 -404.15,-380.89 -403.06,-381.99 ; C1.2 v1(-239.65,-967.37) C2.2
  other v1: 240.74,-382.96 -331.99,-334.16 184.88,-286.96 -199.69,-280.11 410.04,-251.68 408.95,-229.75 123.7,361.04 121.6,421.39
MCU_BOOT0: R3.2 U1.44 | length 262.8
  Top Layer w8: v1(-403.93,-486.47) -385.84,-504.55 -341.31,-504.55 -313.1,-532.77 U1.44
  Bottom Layer w8: v1(-403.93,-486.47) -401.31,-483.85 -401.31,-476.33 -362.96,-437.97 R3.2@-362.96,-398.6
MCU_nRESET: C4.2 P1.1 R2.1 U1.7 | length 830.5
  Top Layer w10: v1(-180,-399.84) -64.3,-515.54 -64.3,-586.41 -95.89,-618 U1.7
  Bottom Layer w10: C4.2 -287.01,-46.07 -287.01,-48.04 -249.08,-85.97 P1.1 -298.34,-173.29 -298.34,-272.11 -175.3,-395.15 v1(-180,-399.84)
MCU_SWDCK: P1.4 U1.37 | length 392.3
  Top Layer w8: P1.4 -265.19,-344.14 U1.37 U1.37@-295.35,-394.97
MCU_SWDIO: P1.2 U1.34 | length 341.6
  Top Layer w8: P1.2 -327.82,-169.9 -314.15,-183.57 -214.5,-183.57 -174.63,-223.43 U1.34
NetC1_1: C1.1 R1.2 U1.5 Y1.1 | length 412.9
  Top Layer w8: R1.2 -236.45,-753.82 -200.03,-717.4 -156.87,-717.4 -135.99,-696.52 -135.99,-666.4 -135.26,-665.67 U1.5
  Top Layer w10: Y1.1 -236.45,-795.39 R1.2
  Bottom Layer w10: C1.1 -331.06,-962.94 Y1.1
NetC2_1: C2.1 R1.1 U1.6 Y1.2 | length 353
  Top Layer w8: Y1.2 -173.46,-855.48 R1.1 -173.46,-755.52 -116.31,-698.36 -116.31,-663.42 U1.6
  Top Layer w10: Y1.2@-138.94,-898.05 Y1.2
  Bottom Layer w10: C2.1 -138.94,-962.49 Y1.2
NetC10_2: C10.2 U2.4
NetC12_1: C12.1 FB1.1 U1.8 | length 108.8
  Top Layer w10: C12.1 -114.17,-753.82 -76.21,-715.86 U1.8
  other v1: -95.19,-734.84
NetC12_2: C12.2 FB2.2 U1.9 | length 163.4
  Top Layer w10: U1.9 -56.52,-750.45 C12.2 -51.18,-757.76 -34.91,-774.03 -34.91,-787.72 -35.08,-787.55 v1@-37.61,-787.55
  Bottom Layer w10: FB2.2 -54.34,-806.25 -37.61,-789.51 v1@-37.61,-787.55
  other v1: -37.31,-794.55
NetC15_2: C15.2 R12.2 U3.2 U3.5 | length 871.9
  Top Layer w16: R12.2 ccw(c-275.47,1131.35) -275.47,1093.93 C15.2 87.83,1093.93 cw(c87.83,993.93) 187.83,993.93 U3.2 187.83,901.48 cw(c127.86,901.48) 127.86,841.5 ccw(c127.86,801.48) 87.83,801.48 U3.5
NetD1_1: D1.1 R5.2 | length 86
  Top Layer w10: D1.1 -564.16,-886.46 R5.2
NetD1_3: D1.3 R4.2 | length 95.8
  Top Layer w10: D1.3 -513.74,-961.08 -513.74,-898.91 R4.2
NetD2_1: D2.1 R11.1 | length 67.5
  Top Layer w16: D2.1 364.23,903.45 ccw(c364.23,912.05) R11.1
NetD2_2: D2.2 U3.1 | length 138.9
  Top Layer w16: U3.1 237.83,986.25 cw(c258.01,986.25) 258.01,1006.42 282.26,1006.42 cw(c282.26,978.45) D2.2
NetFB3_2: FB3.2 J2.1 | length 86.5
  Top Layer w14: J2.1 51.18,-189.45 FB3.2
NetFB4_2: FB4.2 J2.5 J2.6 J2.7 J2.8 J2.9 J2.10 J2.11 | length 309
  Top Layer w10: J2.7 J2.5 J2.10@-51.18,-68.76 ; J2.6@91.09,-155.91 J2.6
  Top Layer w14: v1(95.69,-289.65) 96.54,-290.5 96.54,-316.34 FB4.2
  Bottom Layer w14: v1(95.69,-289.65) 97.06,-288.28 97.06,-167.35 95.69,-165.98 J2.6
NetP2_2: P2.2 R9.2 | length 262
  Top Layer w8: P2.2 276.63,-522.3 276.63,-436.96 287.88,-425.71 326.81,-425.71 361.59,-390.92 R9.2
NetP6_2: P6.2 R13.1 U3.7 | length 861.7
  Top Layer w16: P6.2 0,499.85 ccw(c-2.31,499.85) R13.1 184.58,502.16 ccw(c184.58,602.16) 284.58,602.16 284.58,805.89 ccw(c238.68,805.89) 238.68,851.78 ccw(c238.68,800.93) 187.83,800.93 U3.7
NetQ1_3: Q1.3 R10.1 U3.3 U3.6 | length 638.5
  Top Layer w10: v1(0,879.17) R10.1
  Top Layer w16: U3.6 137.83,722.37 cw(c97.94,722.37) 97.94,682.48 53.61,682.48 cw(c53.61,736.09) 0,736.09 v1(0,879.17) 100.16,879.17 ccw(c100.16,916.84) 137.83,916.84 U3.3
  Bottom Layer w10: Q1.3 v1(0,879.17)
nOE: U1.18 U4.1 U4.19 | length 925.4
  Top Layer w8: U4.19 v1(97.2,-969.5) ; U1.18 165.56,-513.08 v1(183.2,-530.73) ; v1(250,-985) 252.52,-982.48 267.47,-982.48 279.39,-994.4 330.1,-994.4 U4.1
  Bottom Layer w8: v1(97.2,-969.5) 193.43,-873.27 ; 209.65,-556.96 209.65,-683.98 193.43,-700.2 193.43,-873.27 ; v1(250,-985) 219.07,-985 193.43,-959.36 193.43,-873.27
  Bottom Layer w10: v1(183.2,-530.73) 209.43,-556.96 209.65,-556.96
Rp0: J1.24
Rp1: J1.23
Rp2: J1.22
Rp3: J1.21
Rp4: J1.20
Rp5: J1.19
Rp6: J1.18
Rp7: J1.17
StatusLED_1: R4.1 U1.45 | length 522.1
  Top Layer w10: R4.1 v1(-501.02,-787.55) ; U1.45 -212.88,-552.45 -209.13,-548.7 v1(-205.97,-548.7)
  Bottom Layer w10: v1(-501.02,-787.55) -390.68,-787.55 -366.85,-763.72 -366.85,-709.58 v1(-205.97,-548.7)
StatusLED_2: R5.1 U1.46 | length 588.7
  Top Layer w10: v1(-564.16,-787.72) -564.16,-822.94 R5.1 ; U1.46 -264.84,-572.48 -218.34,-572.48 -209.13,-581.7 v1(-205.97,-581.7)
  Bottom Layer w10: v1(-564.16,-787.72) -542.5,-809.37 -385.02,-809.37 -347.5,-771.86 -347.5,-723.23 v1(-205.97,-581.7)
TB0: J1.2 U4.9 | length 458.4
  Top Layer w10: U4.9 394.31,-790.36 431.83,-827.89 431.83,-902.6 545.28,-1016.04 J1.2 J1.2@544.53,-1120.91
TB1: J1.3 U4.7 | length 350.4
  Top Layer w10: U4.7 376.15,-841.55 415.83,-881.23 415.83,-932.57 436.22,-952.96 J1.3
TB2: J1.4 U4.5 | length 325.1
  Top Layer w10: J1.4 327.17,-1098.36 377.54,-1047.99 377.54,-1032.98 410.04,-1000.48 410.04,-950.57 392.94,-933.47 392.94,-905.43 380.23,-892.73 U4.5
TB3: J1.5 U4.3 | length 334.5
  Top Layer w10: J1.5 218.11,-1098.03 287.04,-1029.1 352.53,-1029.1 387.39,-994.24 387.39,-958.19 373.11,-943.91 U4.3
TB4: J1.6 U4.18 | length 257.2
  Top Layer w10: U4.18 110.7,-943.91 124.2,-957.41 124.2,-1023.96 106.34,-1041.83 106.34,-1118.93 J1.6
TB5: J1.7 U4.16 | length 310.9
  Top Layer w10: J1.7 0,-1056.15 -37.61,-1018.55 -37.61,-921.02 -9.32,-892.73 U4.16
TB6: J1.8 U4.14 | length 377.6
  Top Layer w10: J1.8 -109.05,-978.36 -66.37,-935.67 -66.37,-896.04 -11.87,-841.55 U4.14
TB7: J1.9 U4.12 | length 467
  Top Layer w10: J1.9 -218.11,-1032.99 -90.55,-905.43 -90.55,-880.9 -2.13,-792.48 37.85,-792.48 39.96,-790.36 U4.12
TIM1_CH1: R9.1 U1.29 | length 514
  Top Layer w8: v1(259.15,-412.96) 261.76,-410.34 277.22,-410.34 282.92,-404.64 284.89,-404.64 298.6,-390.92 R9.1
  Top Layer w10: U1.29 -75.86,-344.14 -75.86,-387.32
  Bottom Layer w10: v1(-69.39,-396.94) -69.39,-458.36 -56.1,-471.65 -9.95,-471.65 48.75,-412.96 v1(259.15,-412.96)
TIM1_CH2: P5.1 U1.30 | length 679.1
  Top Layer w8: U1.30 -95.89,-400.54 ccw(c-73.99,-400.54) -73.99,-422.44 -24.94,-422.44 v1(-3.2,-400.7) v1@-1.88,-400.7 ; v1(45.35,-359.16) 60.72,-343.79 167.03,-343.79 cw(c167.03,-350.63) 173.87,-350.63 ccw(c182.4,-350.63) 182.4,-359.16 264.88,-359.16 272.92,-351.12 413.93,-351.12 P5.1
  Top Layer w10: U1.30 U1.30@-95.55,-344.14
  Bottom Layer w8: v1(-3.2,-400.7) 0.31,-400.7 41.85,-359.16 v1(45.35,-359.16)
TrIN0: U1.10 U4.11 | length 162.3
  Top Layer w8: U1.10 -36.48,-663.04 -36.48,-711.62 -17.15,-730.96 -17.15,-746.93 0.69,-764.77 U4.11
TrIN1: U1.11 U4.13 | length 293.2
  Top Layer w10: U1.11 -16.81,-663.04 -16.81,-709.78 3.03,-729.62 76.71,-729.62 98.55,-751.46 98.55,-808.5 91.09,-815.96 U4.13
TrIN2: U1.12 U4.15 | length 346.7
  Top Layer w8: U1.12 2.53,-692.22 24.93,-714.62 87.8,-714.62 116.14,-742.96 116.14,-834.18 83.18,-867.14 U4.15 U4.15@50.21,-862.28
TrIN3: U1.13 U4.17 | length 426.4
  Top Layer w10: U4.17 83.18,-918.32 134.15,-867.34 134.15,-645.24 100.42,-611.51 U1.13
TrIN4: U1.14 U4.2 | length 546
  Top Layer w10: U1.14 106.37,-591.82 157.33,-642.77 157.33,-834.05 240.74,-917.46 240.74,-918.14 292.1,-969.5 U4.2
TrIN5: U1.15 U4.4 | length 523.7
  Top Layer w10: U1.15 117.11,-572.14 183.2,-638.24 183.2,-814.48 287.04,-918.32 U4.4
TrIN6: U1.16 U4.6 | length 510.1
  Top Layer w10: U1.16 129.65,-552.45 208.62,-631.42 208.62,-806.67 269.08,-867.14 U4.6
TrIN7: U1.17 U4.8 | length 492.8
  Top Layer w10: U1.17 144.02,-532.77 233.03,-621.78 233.03,-789.84 259.15,-815.96 U4.8
USART1_RX: P3.3 U1.43 | length 386.1
  Top Layer w8: P3.3 -458.21,-317.72 -458.21,-367.86 -312.99,-513.08 U1.43
USART1_TX: P3.2 U1.42 | length 321.1
  Top Layer w8: P3.2 -416.78,-382.89 -307,-492.67 -265.91,-492.67 U1.42
USART3_RX: P4.2 U1.22 | length 858.4
  Top Layer w10: U1.22 109.28,-434.34 124.76,-449.83 226.3,-449.83 v1(248.12,-471.65)
  Bottom Layer w8: v1(248.12,-471.65) 249.73,-473.26 249.73,-726.85 292.67,-769.79 478.59,-769.79 P4.2
USART3_TX: P4.3 U1.21 | length 784.6
  Top Layer w10: U1.21 106.34,-454.03 123.4,-471.09 207.16,-471.09 v1(228.9,-492.82)
  Bottom Layer w8: 228.9,-503.73 234.73,-509.55 234.73,-519.09 229.61,-524.21 229.61,-737 279.98,-787.37 457.82,-787.37 481.83,-811.39 P4.3
  Bottom Layer w10: 228.9,-503.73 v1(228.9,-492.82)
USB_DM: R6.1 U1.32 | length 182.8
  Top Layer w10: U1.32 -134.92,-343.45 -134.92,-296.84 -118.19,-280.11 -54.39,-280.11 -21.65,-247.37 R6.1
USB_DP: R7.1 U1.33 | length 102.7
  Top Layer w10: U1.33 -154.95,-255.72 R7.1
VBUS: C3.1 C11.2 FB3.1 P2.1 R8.2 U2.1 U2.3 U4.20 | length 2467
  Top Layer w10: v1(-8.98,-993.72) -8.29,-994.4 44.67,-994.4 U4.20 ; P2.1 344.51,-454.29 516.66,-454.29 ; U2.1 450.91,-195.07 528.55,-195.07 553.14,-219.65 621.72,-455.17 ; 620.47,-455.54 525.13,-454.03 ccw(c525.13,-591.82) 516.66,-454.29 ; v1(653.9,-971.64) 703.14,-971.64 729.27,-945.51 729.27,-837.81 726.96,-835.5 726.13,-832.5 623.25,-729.62 525.13,-729.62 cw(c525.13,-591.82) 516.66,-454.29
  Top Layer w14: FB3.1 208.75,-232.09 C3.1@217.31,-223.52
  Bottom Layer w8: C11.2@-54.34,-1001.81 -14.32,-1041.83 434.35,-1041.83
  Bottom Layer w10: C11.2 -49.2,-993.72 v1(-8.98,-993.72) ; 434.35,-1041.83 475.47,-1041.83 545.66,-971.64 v1(653.9,-971.64)
pads on no net: J1.1 J1.10 J1.11 J1.12 J1.13 J1.14 J1.15 J1.16 J2.4 P6.0 Q1.2 U1.2 U1.3 U1.4 U1.19 U1.20 U1.25 U1.26 U1.27 U1.28 U1.31 U1.38 U1.39 U1.40 U1.41
copper on no net:
  other v2: 398.9,184.99 -377.98,197.16
  other v3: -393.7,766.25 393.7,766.25

## Polygon pours and split planes (outlines as drawn)
no net on Top Layer "Top Layer-No Net" (solid, pour order 0): 661.84,-1078.13
GND on Bottom Layer (solid, pour order 12): -519.68,59.06 -519.68,1208.03 519.69,1208.03 519.69,59.06
GND on Bottom Layer "Bottom Layer-GND" (hatched Horizontal grid 6 track 6, remove dead copper, pour order 10): -748.12,-1197.16 747.95,-1197.16 747.95,-709.57 408.84,-709.44 408.84,-472.75 650.08,-472.75 519.6,-0.3 -519.68,0 -649.77,-472.75 -406.64,-472.75 -406.64,-708.97 -748.12,-708.97

## Keep-outs
Keep-Out Layer:
  the board outline again, w11.81

## Other copper
Top Layer:
  rectangle: -499.23,317.99 -398.95,662.64
  rectangle net GND: 137.8,-312.46 255.75,-272.68
  rectangle net VBUS: 281.2,-205.43 355.67,-114.5
  rectangle net GND: 96.94,315.39 133.15,453.2
  rectangle net VBUS: 248.12,-205.57 286.25,-169.9
  rectangle: 170.51,-95.37 509.9,-20.08
  rectangle net NetFB4_2: 72.45,-183.57 98.55,-126
  rectangle net NetFB4_2: -95.89,-126.33 98.55,-19.54
  rectangle net NetFB4_2: -95.89,-183.57 -42.91,-125.23
  rectangle net GND: 396.31,-256.62 418.9,-169.55
  rectangle net GND: 281.2,-261.28 532.36,-218.42
  rectangle net NetC10_2: 281.2,-318.22 385.56,-281.57
  rectangle net VBUS: 354.97,-205.43 382.47,-140.8
  rectangle net VBUS: 431.6,-206.95 459.1,-140.8
  rectangle net VBUS: 354.97,-142.32 459.1,-101.99
  rectangle net 3.3VD: 434.12,-318.22 528.55,-276.97
Bottom Layer:
  rectangle net 3.3VD: 457.8,-324.65 498.83,-268.96
  rectangle net 3.3VD: -189.35,-337.63 498.83,-324.65
  pour cut-out: -194.65,77.62 -195.22,-77.82 -172.08,-100.96 -170.04,-98.91 569.16,-98.91 550.79,-80.54 550.79,78

## Silkscreen, mask and mechanical layers (free items; w line width, h text height)
Top Overlay:
  text "T" at -355.27,-296.47 h30
  text "R" at -593.42,-324.65 h30
  text "G" at -593.42,-393.69 h30
  text "G" at 610.94,-462.24 h30
  text "M" at 443.2,-478.96 h30
  text "5" at 234.8,-485.4 h30
  text "M" at 235.27,-585.89 h30
  text "G" at 237.67,-692.6 h30
  text "T" at 472.65,-807.41 h30
  text "R" at 569.16,-807.23 h30
  text "G" at 670.99,-807.84 h30
Top Solder:
  text "TEMT6000 PT" at -454.79,328.8 h30 r90
  text "LiuMiao 19.9" at -412.89,327.39 h30 r90
  text "NS-Trig v3" at 174.9,-53.81 h30
  text "LiuMiao 19.9" at 174.39,-92.01 h30